# Altium PCB Copy of main - shifted.PcbDoc (part 10 of 15)
Units mil, origin at the board's own origin, x right, y up, seen from the top; angles counter-clockwise.
Board outline 8394.55 x 5164.44 mil, 7 copper layers (Top Layer 1, Layer 2, Layer 3, Unused, Layer 4_pow, Layer 5_gnd, Bottom 6+gnd), stack 46.112 mil thick; 363 components, 409 nets, 1750 pads, 991 vias.
Unrouted connection lines stored in the file: 111.
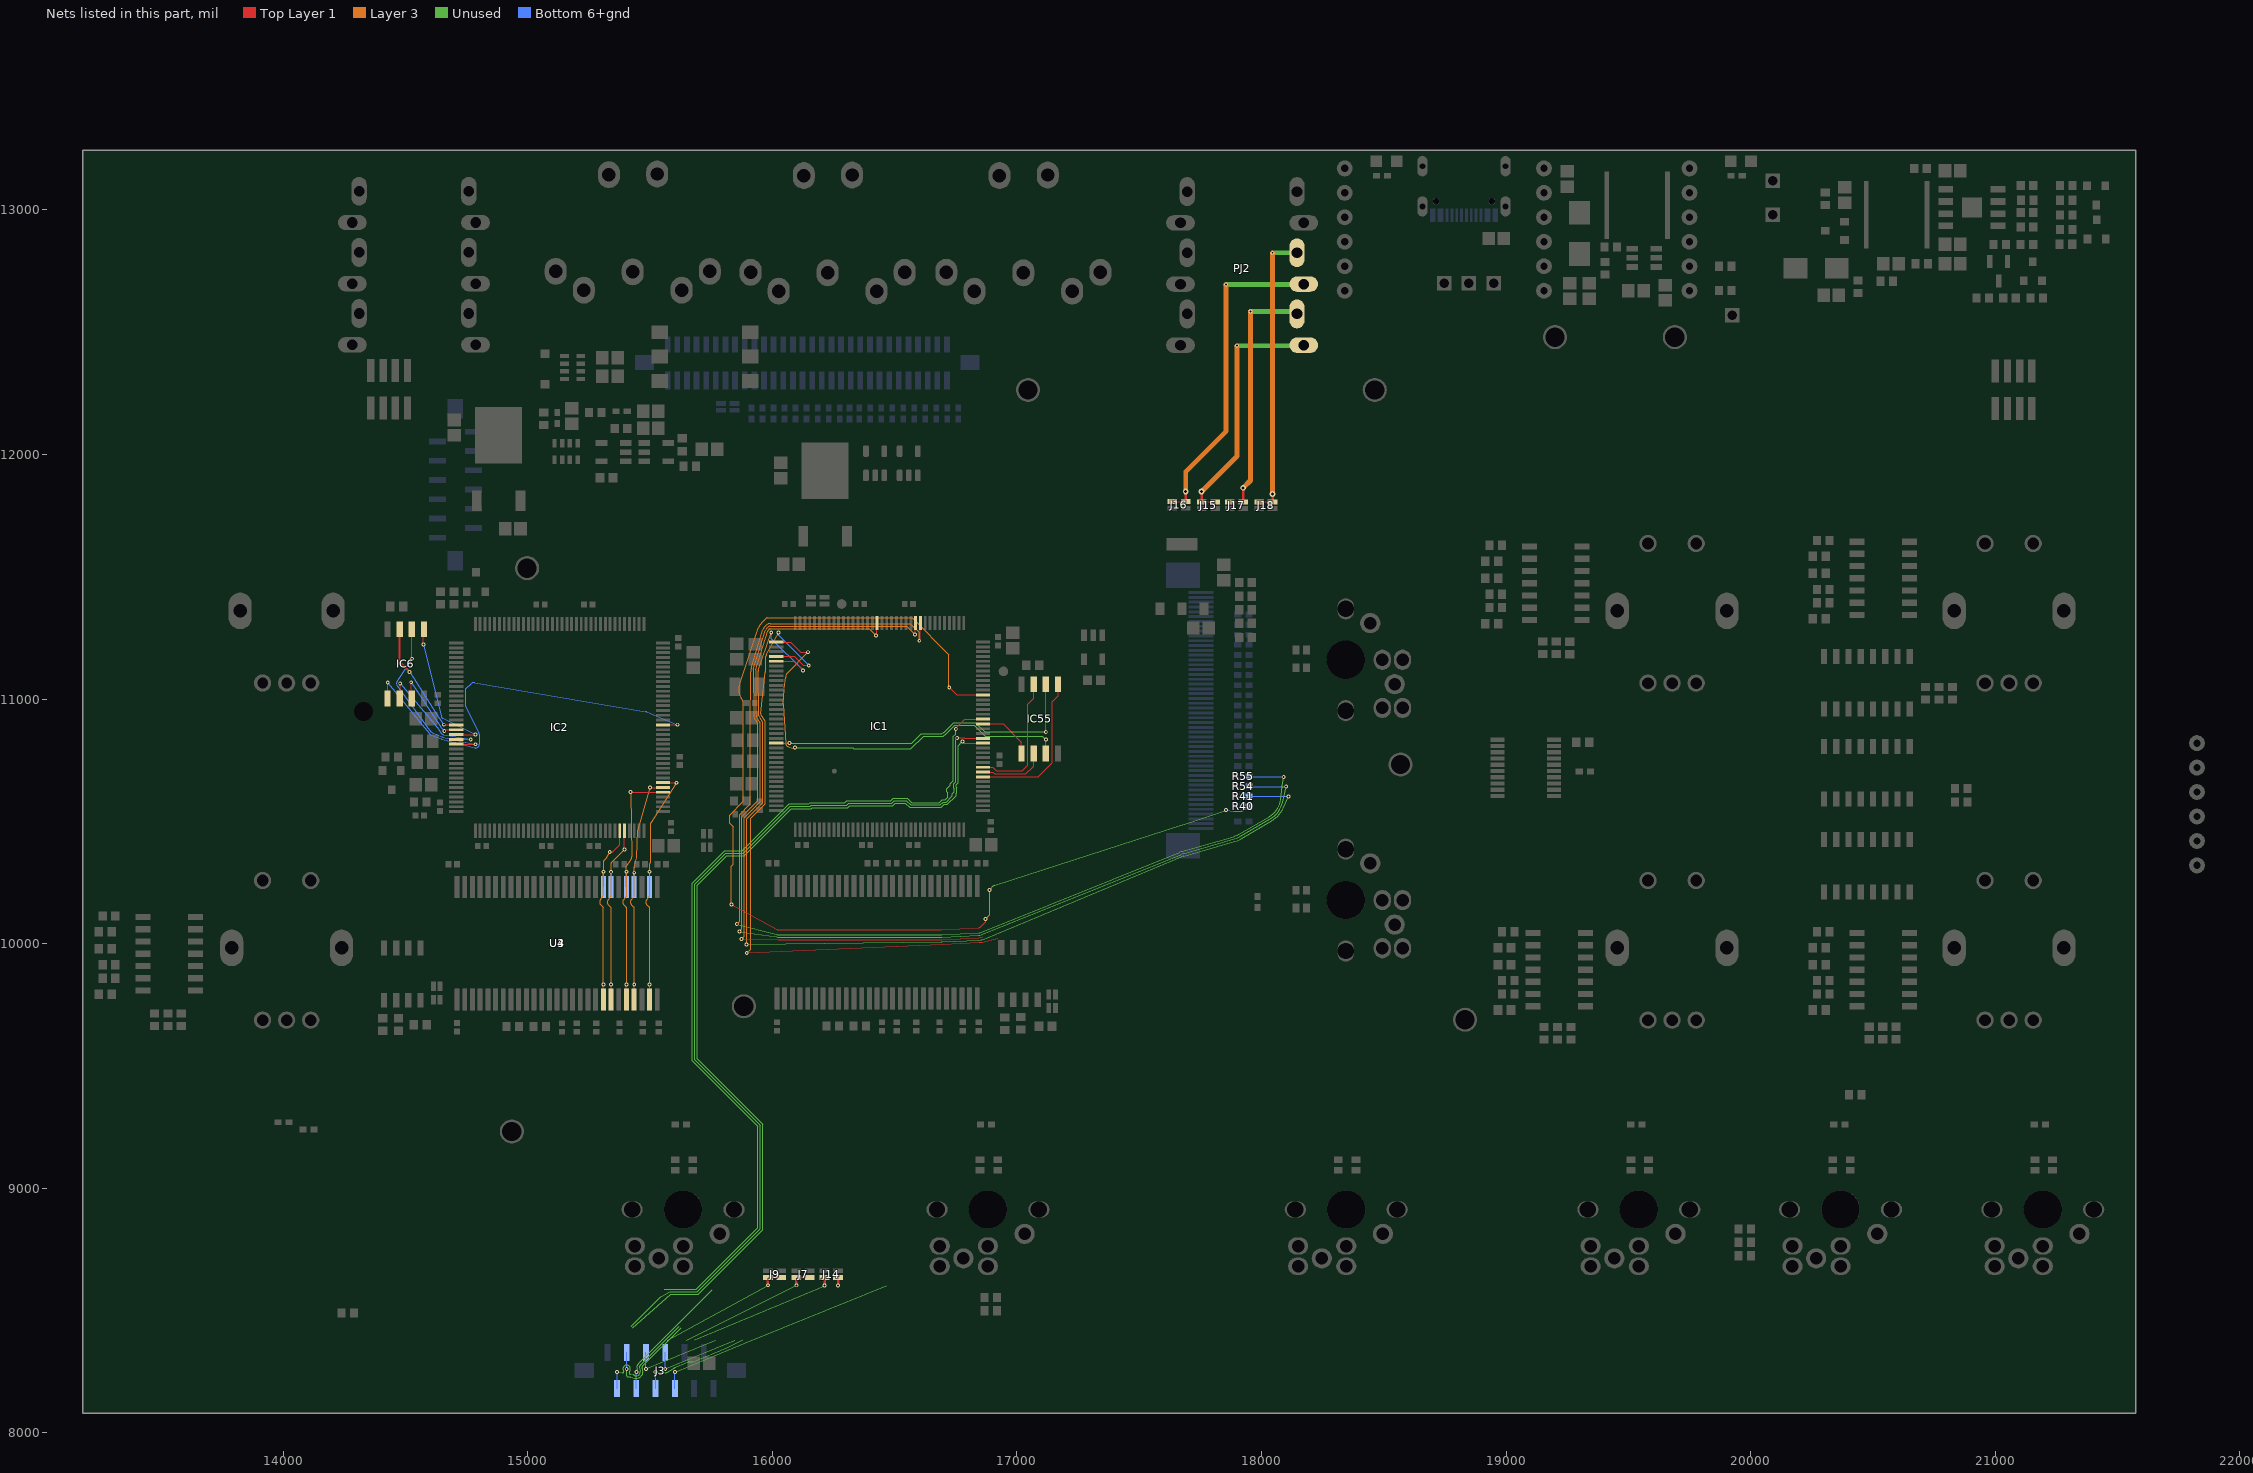
[diagram p13: the nets of this part, all layers, seen from the top]

## Via types
v1: diameter 15.75, hole 7.87, Top Layer 1 to Bottom 6+gnd, tented both sides, 923 vias
v2: diameter 27.56, hole 11.81, Top Layer 1 to Bottom 6+gnd, 45 vias
v3: diameter 23.62/23.62/23.62/23.62/23.62/23.62/23.62 (per signal layer), hole 12, Top Layer 1 to Bottom 6+gnd, tented top, 10 vias
v4: diameter 15.75, hole 7.87, Top Layer 1 to Bottom 6+gnd, 10 vias
v5: diameter 23.62/23.62/23.62/23.62/23.62/23.62/23.62 (per signal layer), hole 12, Top Layer 1 to Bottom 6+gnd, tented bottom, 3 vias

## Nets (pads, with @x,y where several pads share a name; then routed paths per layer and width w, separated by ;. In a path a pad name is that pad's centre, name@x,y a point inside that pad or via, vN(x,y) a via of type N, cw(c..) or ccw(c..) an arc to the next point about the centre after c; other vN are vias at no path point) (continued)
DD11: IC2.67 U3.47 U4.47 | length 1291.6
  Top Layer 1 w5: U3.47@15308.83,9771.4 v1@15308.83,9833.24 ; v1(15334.85,10374.63) 15345.25,10374.63 15375.91,10405.29 IC2.67@15375.91,10461.87
  Layer 3 w5: v1(15309.07,9833.49) 15309.07,10145.64 ; 15309.07,10200.79 cw(c15304.07,10200.88) 15308.29,10198.2 15295.6,10178.18 ; 15309.07,10200.83 15309.07,10293.59 v1(15309.58,10294.1) 15309.58,10336.08 ; 15323.63,10353.18 v1(15334.85,10374.63) ; 15295.6,10178.18 ccw(c15308.58,10169.94) 15297.73,10159.05 ; 15295.6,10178.18 ccw(c15308.58,10169.94) 15297.73,10159.05 ; 15295.6,10178.18 ccw(c15308.58,10169.94) 15297.73,10159.05 ; 15295.6,10178.18 ccw(c15308.58,10169.94) 15297.73,10159.05 ; 15295.6,10178.18 ccw(c15308.58,10169.94) 15297.73,10159.05 ; 15295.6,10178.18 ccw(c15308.58,10169.94) 15297.73,10159.05 ; 15295.6,10178.18 ccw(c15308.58,10169.94) 15297.73,10159.05 ; 15295.6,10178.18 ccw(c15308.58,10169.94) 15297.73,10159.05 ; 15295.6,10178.18 ccw(c15308.58,10169.94) 15297.73,10159.05 ; 15295.6,10178.18 ccw(c15308.58,10169.94) 15297.73,10159.05 ; 15295.6,10178.18 ccw(c15308.58,10169.94) 15297.73,10159.05 ; 15295.6,10178.18 ccw(c15308.58,10169.94) 15297.73,10159.05 ; 15295.6,10178.18 ccw(c15308.58,10169.94) 15297.73,10159.05 ; 15295.6,10178.18 ccw(c15308.58,10169.94) 15297.73,10159.05 ; 15295.6,10178.18 ccw(c15308.58,10169.94) 15297.73,10159.05 ; 15295.6,10178.18 ccw(c15308.58,10169.94) 15297.73,10159.05 ; 15297.73,10159.05 15307.62,10149.12 ; 15307.62,10149.12 cw(c15304.07,10145.59) 15309.07,10145.68 ; 15307.62,10149.12 cw(c15304.07,10145.59) 15309.07,10145.68 ; 15307.62,10149.12 cw(c15304.07,10145.59) 15309.07,10145.68 ; 15307.62,10149.12 cw(c15304.07,10145.59) 15309.07,10145.68 ; 15307.62,10149.12 cw(c15304.07,10145.59) 15309.07,10145.68 ; 15307.62,10149.12 cw(c15304.07,10145.59) 15309.07,10145.68 ; 15307.62,10149.12 cw(c15304.07,10145.59) 15309.07,10145.68 ; 15307.62,10149.12 cw(c15304.07,10145.59) 15309.07,10145.68 ; 15307.62,10149.12 cw(c15304.07,10145.59) 15309.07,10145.68 ; 15307.62,10149.12 cw(c15304.07,10145.59) 15309.07,10145.68 ; 15307.62,10149.12 cw(c15304.07,10145.59) 15309.07,10145.68 ; 15307.62,10149.12 cw(c15304.07,10145.59) 15309.07,10145.68 ; 15307.62,10149.12 cw(c15304.07,10145.59) 15309.07,10145.68 ; 15307.62,10149.12 cw(c15304.07,10145.59) 15309.07,10145.68 ; 15307.62,10149.12 cw(c15304.07,10145.59) 15309.07,10145.68 ; 15307.62,10149.12 cw(c15304.07,10145.59) 15309.07,10145.68 ; 15309.58,10336.08 cw(c15314.58,10336.08) 15311.02,10339.59 ; 15309.58,10336.08 cw(c15314.58,10336.08) 15311.02,10339.59 ; 15309.58,10336.08 cw(c15314.58,10336.08) 15311.02,10339.59 ; 15309.58,10336.08 cw(c15314.58,10336.08) 15311.02,10339.59 ; 15309.58,10336.08 cw(c15314.58,10336.08) 15311.02,10339.59 ; 15309.58,10336.08 cw(c15314.58,10336.08) 15311.02,10339.59 ; 15309.58,10336.08 cw(c15314.58,10336.08) 15311.02,10339.59 ; 15309.58,10336.08 cw(c15314.58,10336.08) 15311.02,10339.59 ; 15309.58,10336.08 cw(c15314.58,10336.08) 15311.02,10339.59 ; 15309.58,10336.08 cw(c15314.58,10336.08) 15311.02,10339.59 ; 15309.58,10336.08 cw(c15314.58,10336.08) 15311.02,10339.59 ; 15309.58,10336.08 cw(c15314.58,10336.08) 15311.02,10339.59 ; 15309.58,10336.08 cw(c15314.58,10336.08) 15311.02,10339.59 ; 15309.58,10336.08 cw(c15314.58,10336.08) 15311.02,10339.59 ; 15309.58,10336.08 cw(c15314.58,10336.08) 15311.02,10339.59 ; 15309.58,10336.08 cw(c15314.58,10336.08) 15311.02,10339.59 ; 15311.02,10339.59 15320.89,10349.46 ; 15320.89,10349.46 ccw(c15310,10360.32) 15323.62,10353.19 ; 15320.89,10349.46 ccw(c15310,10360.32) 15323.62,10353.19 ; 15320.89,10349.46 ccw(c15310,10360.32) 15323.62,10353.19 ; 15320.89,10349.46 ccw(c15310,10360.32) 15323.62,10353.19 ; 15320.89,10349.46 ccw(c15310,10360.32) 15323.62,10353.19 ; 15320.89,10349.46 ccw(c15310,10360.32) 15323.62,10353.19 ; 15320.89,10349.46 ccw(c15310,10360.32) 15323.62,10353.19 ; 15320.89,10349.46 ccw(c15310,10360.32) 15323.62,10353.19 ; 15320.89,10349.46 ccw(c15310,10360.32) 15323.62,10353.19 ; 15320.89,10349.46 ccw(c15310,10360.32) 15323.62,10353.19 ; 15320.89,10349.46 ccw(c15310,10360.32) 15323.62,10353.19 ; 15320.89,10349.46 ccw(c15310,10360.32) 15323.62,10353.19 ; 15320.89,10349.46 ccw(c15310,10360.32) 15323.62,10353.19 ; 15320.89,10349.46 ccw(c15310,10360.32) 15323.62,10353.19 ; 15320.89,10349.46 ccw(c15310,10360.32) 15323.62,10353.19 ; 15320.89,10349.46 ccw(c15310,10360.32) 15323.62,10353.19
  Bottom 6+gnd w5: U4.47@15308.83,10232.03 15309.58,10232.78 v1(15309.58,10294.1)
DD12: IC2.68 U3.48 U4.48 | length 1210.8
  Top Layer 1 w5: U3.48@15340.32,9771.4 v1@15340.32,9833.24 ; v1(15394.85,10384.63) 15395.22,10385 15395.22,10461.18 IC2.68@15395.48,10461.44
  Layer 3 w5: v1(15340.57,9833.49) 15340.57,10145.64 ; 15340.57,10195.56 15340.57,10293.63 v1(15340.33,10293.87) 15340.08,10294.12 15340.08,10327.78 ; v1(15394.85,10384.63) 15341.52,10331.3 ; 15328.56,10180.13 ccw(c15340.08,10169.94) 15329.21,10159.07 ; 15328.56,10180.13 ccw(c15340.08,10169.94) 15329.21,10159.07 ; 15328.56,10180.13 ccw(c15340.08,10169.94) 15329.21,10159.07 ; 15328.56,10180.13 ccw(c15340.08,10169.94) 15329.21,10159.07 ; 15328.56,10180.13 ccw(c15340.08,10169.94) 15329.2,10159.07 ; 15328.56,10180.13 ccw(c15340.08,10169.94) 15329.2,10159.07 ; 15328.56,10180.13 ccw(c15340.08,10169.94) 15329.2,10159.07 ; 15328.56,10180.13 ccw(c15340.08,10169.94) 15329.2,10159.07 ; 15328.56,10180.13 ccw(c15340.08,10169.94) 15329.2,10159.07 ; 15328.56,10180.13 ccw(c15340.08,10169.94) 15329.2,10159.07 ; 15328.56,10180.13 ccw(c15340.08,10169.94) 15329.2,10159.07 ; 15328.56,10180.13 ccw(c15340.08,10169.94) 15329.2,10159.07 ; 15328.56,10180.13 15339.31,10192.29 ; 15329.21,10159.07 15339.1,10149.17 ; 15339.1,10149.17 cw(c15335.57,10145.64) 15340.57,10145.67 ; 15339.1,10149.17 cw(c15335.57,10145.64) 15340.57,10145.67 ; 15339.1,10149.17 cw(c15335.57,10145.64) 15340.57,10145.67 ; 15339.1,10149.17 cw(c15335.57,10145.64) 15340.57,10145.67 ; 15339.1,10149.17 cw(c15335.57,10145.64) 15340.57,10145.67 ; 15339.1,10149.17 cw(c15335.57,10145.64) 15340.57,10145.67 ; 15339.1,10149.17 cw(c15335.57,10145.64) 15340.57,10145.67 ; 15339.1,10149.17 cw(c15335.57,10145.64) 15340.57,10145.67 ; 15339.1,10149.17 cw(c15335.57,10145.64) 15340.57,10145.67 ; 15339.1,10149.17 cw(c15335.57,10145.64) 15340.57,10145.67 ; 15339.1,10149.17 cw(c15335.57,10145.64) 15340.57,10145.67 ; 15339.1,10149.17 cw(c15335.57,10145.64) 15340.57,10145.67 ; 15339.1,10149.17 cw(c15335.57,10145.64) 15340.57,10145.67 ; 15339.1,10149.17 cw(c15335.57,10145.64) 15340.57,10145.67 ; 15339.1,10149.17 cw(c15335.57,10145.64) 15340.57,10145.67 ; 15339.1,10149.17 cw(c15335.57,10145.64) 15340.57,10145.67 ; 15339.31,10192.29 ccw(c15335.57,10195.6) 15340.57,10195.51 ; 15339.31,10192.29 ccw(c15335.57,10195.6) 15340.57,10195.51 ; 15339.31,10192.29 ccw(c15335.57,10195.6) 15340.57,10195.51 ; 15339.31,10192.29 ccw(c15335.57,10195.6) 15340.57,10195.51 ; 15339.31,10192.29 ccw(c15335.57,10195.6) 15340.57,10195.51 ; 15339.31,10192.29 ccw(c15335.57,10195.6) 15340.57,10195.51 ; 15339.31,10192.29 ccw(c15335.57,10195.6) 15340.57,10195.51 ; 15339.31,10192.29 ccw(c15335.57,10195.6) 15340.57,10195.51 ; 15339.31,10192.29 ccw(c15335.57,10195.6) 15340.57,10195.51 ; 15339.31,10192.29 ccw(c15335.57,10195.6) 15340.57,10195.51 ; 15339.31,10192.29 ccw(c15335.57,10195.6) 15340.57,10195.51 ; 15339.31,10192.29 ccw(c15335.57,10195.6) 15340.57,10195.51 ; 15339.31,10192.29 ccw(c15335.57,10195.6) 15340.57,10195.51 ; 15339.31,10192.29 ccw(c15335.57,10195.6) 15340.57,10195.51 ; 15339.31,10192.29 ccw(c15335.57,10195.6) 15340.57,10195.51 ; 15339.31,10192.29 ccw(c15335.57,10195.6) 15340.57,10195.51 ; 15340.08,10327.78 cw(c15345.08,10327.78) 15341.52,10331.3 ; 15340.08,10327.78 cw(c15345.08,10327.78) 15341.51,10331.29 ; 15340.08,10327.78 cw(c15345.08,10327.78) 15341.51,10331.29 ; 15340.08,10327.78 cw(c15345.08,10327.78) 15341.51,10331.29 ; 15340.08,10327.78 cw(c15345.08,10327.78) 15341.51,10331.29 ; 15340.08,10327.78 cw(c15345.08,10327.78) 15341.51,10331.29 ; 15340.08,10327.78 cw(c15345.08,10327.78) 15341.51,10331.29 ; 15340.08,10327.78 cw(c15345.08,10327.78) 15341.51,10331.29 ; 15340.08,10327.78 cw(c15345.08,10327.78) 15341.51,10331.29 ; 15340.08,10327.78 cw(c15345.08,10327.78) 15341.51,10331.29 ; 15340.08,10327.78 cw(c15345.08,10327.78) 15341.51,10331.29 ; 15340.08,10327.78 cw(c15345.08,10327.78) 15341.51,10331.29 ; 15340.08,10327.78 cw(c15345.08,10327.78) 15341.51,10331.29 ; 15340.08,10327.78 cw(c15345.08,10327.78) 15341.51,10331.29 ; 15340.08,10327.78 cw(c15345.08,10327.78) 15341.51,10331.29 ; 15340.08,10327.78 cw(c15345.08,10327.78) 15341.51,10331.29
  Bottom 6+gnd w5: U4.48@15340.33,10232.03 v1(15340.33,10293.87)
DD13: IC2.77 U3.50 U4.50 | length 1358.1
  Top Layer 1 w5: U3.50@15403.31,9771.4 v1@15403.31,9833.24 ; v1(15419.85,10619.63) 15420.26,10619.21 15479.52,10619.21 15479.93,10618.8 ; 15480.01,10618.88 IC2.77@15552.61,10618.88
  Layer 3 w5: 15392.17,10159.1 cw(c15403.07,10169.94) 15391.55,10180.12 15402.31,10192.29 ; 15392.18,10159.1 15402.1,10149.12 ; v1(15403.56,9833.49) 15403.56,10145.64 ; 15403.56,10195.56 15403.56,10293.63 v1(15403.07,10294.12) 15403.07,10315.78 ; v1(15419.85,10619.63) 15425.22,10354.94 ; 15402.1,10149.12 cw(c15398.56,10145.59) 15403.56,10145.68 ; 15402.1,10149.12 cw(c15398.56,10145.59) 15403.56,10145.68 ; 15402.1,10149.12 cw(c15398.56,10145.59) 15403.56,10145.68 ; 15402.1,10149.12 cw(c15398.56,10145.59) 15403.56,10145.68 ; 15402.1,10149.12 cw(c15398.56,10145.59) 15403.56,10145.68 ; 15402.1,10149.12 cw(c15398.56,10145.59) 15403.56,10145.68 ; 15402.1,10149.12 cw(c15398.56,10145.59) 15403.56,10145.68 ; 15402.1,10149.12 cw(c15398.56,10145.59) 15403.56,10145.68 ; 15402.1,10149.12 cw(c15398.56,10145.59) 15403.56,10145.68 ; 15402.1,10149.12 cw(c15398.56,10145.59) 15403.56,10145.68 ; 15402.1,10149.12 cw(c15398.56,10145.59) 15403.56,10145.68 ; 15402.1,10149.12 cw(c15398.56,10145.59) 15403.56,10145.68 ; 15402.1,10149.12 cw(c15398.56,10145.59) 15403.56,10145.68 ; 15402.1,10149.12 cw(c15398.56,10145.59) 15403.56,10145.68 ; 15402.1,10149.12 cw(c15398.56,10145.59) 15403.56,10145.68 ; 15402.1,10149.12 cw(c15398.56,10145.59) 15403.56,10145.68 ; 15402.31,10192.29 ccw(c15398.56,10195.6) 15403.56,10195.51 ; 15402.31,10192.29 ccw(c15398.56,10195.6) 15403.56,10195.51 ; 15402.31,10192.29 ccw(c15398.56,10195.6) 15403.56,10195.51 ; 15402.31,10192.29 ccw(c15398.56,10195.6) 15403.56,10195.51 ; 15402.31,10192.29 ccw(c15398.56,10195.6) 15403.56,10195.51 ; 15402.31,10192.29 ccw(c15398.56,10195.6) 15403.56,10195.51 ; 15402.31,10192.29 ccw(c15398.56,10195.6) 15403.56,10195.51 ; 15402.31,10192.29 ccw(c15398.56,10195.6) 15403.56,10195.51 ; 15402.31,10192.29 ccw(c15398.56,10195.6) 15403.56,10195.51 ; 15402.31,10192.29 ccw(c15398.56,10195.6) 15403.56,10195.51 ; 15402.31,10192.29 ccw(c15398.56,10195.6) 15403.56,10195.51 ; 15402.31,10192.29 ccw(c15398.56,10195.6) 15403.56,10195.51 ; 15402.31,10192.29 ccw(c15398.56,10195.6) 15403.56,10195.51 ; 15402.31,10192.29 ccw(c15398.56,10195.6) 15403.56,10195.51 ; 15402.31,10192.29 ccw(c15398.56,10195.6) 15403.56,10195.51 ; 15402.31,10192.29 ccw(c15398.56,10195.6) 15403.56,10195.51 ; 15403.07,10315.78 cw(c15408.07,10315.78) 15403.94,10318.59 ; 15403.07,10315.78 cw(c15408.07,10315.78) 15403.94,10318.59 ; 15403.07,10315.78 cw(c15408.07,10315.78) 15403.94,10318.59 ; 15403.07,10315.78 cw(c15408.07,10315.78) 15403.94,10318.59 ; 15403.07,10315.78 cw(c15408.07,10315.78) 15403.94,10318.59 ; 15403.07,10315.78 cw(c15408.07,10315.78) 15403.94,10318.59 ; 15403.07,10315.78 cw(c15408.07,10315.78) 15403.94,10318.59 ; 15403.07,10315.78 cw(c15408.07,10315.78) 15403.94,10318.59 ; 15403.07,10315.78 cw(c15408.07,10315.78) 15403.94,10318.59 ; 15403.07,10315.78 cw(c15408.07,10315.78) 15403.94,10318.59 ; 15403.07,10315.78 cw(c15408.07,10315.78) 15403.94,10318.59 ; 15403.07,10315.78 cw(c15408.07,10315.78) 15403.94,10318.59 ; 15403.07,10315.78 cw(c15408.07,10315.78) 15403.94,10318.59 ; 15403.07,10315.78 cw(c15408.07,10315.78) 15403.94,10318.59 ; 15403.07,10315.78 cw(c15408.07,10315.78) 15403.94,10318.59 ; 15403.07,10315.78 cw(c15408.07,10315.78) 15403.94,10318.59 ; 15403.94,10318.59 15422.56,10345.98 ; 15422.56,10345.98 ccw(c15409.85,10354.63) 15425.22,10354.94 ; 15422.56,10345.98 ccw(c15409.85,10354.63) 15425.22,10354.94 ; 15422.56,10345.98 ccw(c15409.85,10354.63) 15425.22,10354.94 ; 15422.56,10345.98 ccw(c15409.85,10354.63) 15425.22,10354.94 ; 15422.56,10345.98 ccw(c15409.85,10354.63) 15425.22,10354.94 ; 15422.56,10345.98 ccw(c15409.85,10354.63) 15425.22,10354.94 ; 15422.56,10345.98 ccw(c15409.85,10354.63) 15425.22,10354.94 ; 15422.56,10345.98 ccw(c15409.85,10354.63) 15425.22,10354.94 ; 15422.56,10345.98 ccw(c15409.85,10354.63) 15425.22,10354.94 ; 15422.56,10345.98 ccw(c15409.85,10354.63) 15425.22,10354.94 ; 15422.56,10345.98 ccw(c15409.85,10354.63) 15425.22,10354.94 ; 15422.56,10345.98 ccw(c15409.85,10354.63) 15425.22,10354.94 ; 15422.56,10345.98 ccw(c15409.85,10354.63) 15425.22,10354.94 ; 15422.56,10345.98 ccw(c15409.85,10354.63) 15425.22,10354.94 ; 15422.56,10345.98 ccw(c15409.85,10354.63) 15425.22,10354.94 ; 15422.56,10345.98 ccw(c15409.85,10354.63) 15425.22,10354.94
  Bottom 6+gnd w5: U4.50@15403.31,10232.03 v1@15403.31,10293.87
DD14: IC2.78 U3.51 U4.51 | length 1106.9
  Top Layer 1 w5: U3.51@15434.81,9771.4 v1@15434.81,9833.24 ; v1@15500.16,10638.41 IC2.78@15552.45,10638.41
  Layer 3 w5: v1(15435.06,9833.49) 15435.06,10145.64 ; 15435.06,10195.56 v1(15435.06,10290.22) 15435.06,10311.14 cw(c15440.06,10311.14) 15435.22,10312.4 15444.03,10345.53 ccw(c15409.85,10354.63) 15445.19,10353.12 15449.89,10463.17 ; 15449.89,10463.2 cw(c15454.88,10462.93) 15449.9,10463.3 15449.92,10463.62 cw(c15464.88,10462.47) 15450.46,10466.62 v1(15499.93,10638.17) ; 15433.6,10149.12 cw(c15430.06,10145.59) 15435.06,10145.68 ; 15433.6,10149.12 cw(c15430.06,10145.59) 15435.06,10145.68 ; 15433.6,10149.12 cw(c15430.06,10145.59) 15435.06,10145.68 ; 15433.6,10149.12 cw(c15430.06,10145.59) 15435.06,10145.68 ; 15433.6,10149.12 cw(c15430.06,10145.59) 15435.06,10145.68 ; 15433.6,10149.12 cw(c15430.06,10145.59) 15435.06,10145.68 ; 15433.6,10149.12 cw(c15430.06,10145.59) 15435.06,10145.68 ; 15433.6,10149.12 cw(c15430.06,10145.59) 15435.06,10145.68 ; 15433.6,10149.12 cw(c15430.06,10145.59) 15435.06,10145.68 ; 15433.6,10149.12 cw(c15430.06,10145.59) 15435.06,10145.68 ; 15433.6,10149.12 cw(c15430.06,10145.59) 15435.06,10145.68 ; 15433.6,10149.12 cw(c15430.06,10145.59) 15435.06,10145.68 ; 15433.6,10149.12 cw(c15430.06,10145.59) 15435.06,10145.68 ; 15433.6,10149.12 cw(c15430.06,10145.59) 15435.06,10145.68 ; 15433.6,10149.12 cw(c15430.06,10145.59) 15435.06,10145.68 ; 15433.6,10149.12 cw(c15430.06,10145.59) 15435.06,10145.68 ; 15433.6,10149.12 15423.67,10159.1 cw(c15434.57,10169.94) 15423.04,10180.12 15433.8,10192.29 ; 15433.8,10192.29 ccw(c15430.06,10195.6) 15435.06,10195.51 ; 15433.8,10192.29 ccw(c15430.06,10195.6) 15435.06,10195.51 ; 15433.8,10192.29 ccw(c15430.06,10195.6) 15435.06,10195.51 ; 15433.8,10192.29 ccw(c15430.06,10195.6) 15435.06,10195.51 ; 15433.8,10192.29 ccw(c15430.06,10195.6) 15435.06,10195.51 ; 15433.8,10192.29 ccw(c15430.06,10195.6) 15435.06,10195.51 ; 15433.8,10192.29 ccw(c15430.06,10195.6) 15435.06,10195.51 ; 15433.8,10192.29 ccw(c15430.06,10195.6) 15435.06,10195.51 ; 15433.8,10192.29 ccw(c15430.06,10195.6) 15435.06,10195.51 ; 15433.8,10192.29 ccw(c15430.06,10195.6) 15435.06,10195.51 ; 15433.8,10192.29 ccw(c15430.06,10195.6) 15435.06,10195.51 ; 15433.8,10192.29 ccw(c15430.06,10195.6) 15435.06,10195.51 ; 15433.8,10192.29 ccw(c15430.06,10195.6) 15435.06,10195.51 ; 15433.8,10192.29 ccw(c15430.06,10195.6) 15435.06,10195.51 ; 15433.8,10192.29 ccw(c15430.06,10195.6) 15435.06,10195.51 ; 15433.8,10192.29 ccw(c15430.06,10195.6) 15435.06,10195.51
  Bottom 6+gnd w5: U4.51@15434.81,10232.03 15435.06,10232.28 v1(15435.06,10290.22)
DD15: IC2.79 U3.53 U4.53 | length 1158
  Top Layer 1 w5: U3.53@15497.8,9771.46 v1@15497.8,9833.24 ; IC2.79@15552.61,10658.25 15552.8,10658.06 15607.9,10658.06 v1(15608.09,10657.87)
  Layer 3 w5: v1(15498.05,9833.49) 15498.05,10145.64 ; 15498.05,10195.56 15498.05,10293.63 v1(15497.56,10294.12) 15497.56,10327.34 15502.95,10332.73 15502.95,10491.51 cw(c15507.95,10491.51) 15503.73,10494.2 v1(15608.09,10657.87) ; 15496.59,10149.12 cw(c15493.05,10145.59) 15498.05,10145.68 ; 15496.59,10149.12 cw(c15493.05,10145.59) 15498.05,10145.68 ; 15496.59,10149.12 cw(c15493.05,10145.59) 15498.05,10145.68 ; 15496.59,10149.12 cw(c15493.05,10145.59) 15498.05,10145.68 ; 15496.59,10149.12 cw(c15493.05,10145.59) 15498.05,10145.68 ; 15496.59,10149.12 cw(c15493.05,10145.59) 15498.05,10145.68 ; 15496.59,10149.12 cw(c15493.05,10145.59) 15498.05,10145.68 ; 15496.59,10149.12 cw(c15493.05,10145.59) 15498.05,10145.68 ; 15496.59,10149.12 cw(c15493.05,10145.59) 15498.05,10145.68 ; 15496.59,10149.12 cw(c15493.05,10145.59) 15498.05,10145.68 ; 15496.59,10149.12 cw(c15493.05,10145.59) 15498.05,10145.68 ; 15496.59,10149.12 cw(c15493.05,10145.59) 15498.05,10145.68 ; 15496.59,10149.12 cw(c15493.05,10145.59) 15498.05,10145.68 ; 15496.59,10149.12 cw(c15493.05,10145.59) 15498.05,10145.68 ; 15496.59,10149.12 cw(c15493.05,10145.59) 15498.05,10145.68 ; 15496.59,10149.12 cw(c15493.05,10145.59) 15498.05,10145.68 ; 15496.59,10149.12 15486.66,10159.1 cw(c15497.56,10169.94) 15486.03,10180.12 15496.79,10192.29 ; 15496.79,10192.29 ccw(c15493.05,10195.6) 15498.05,10195.51 ; 15496.79,10192.29 ccw(c15493.05,10195.6) 15498.05,10195.51 ; 15496.79,10192.29 ccw(c15493.05,10195.6) 15498.05,10195.51 ; 15496.79,10192.29 ccw(c15493.05,10195.6) 15498.05,10195.51 ; 15496.79,10192.29 ccw(c15493.05,10195.6) 15498.05,10195.51 ; 15496.79,10192.29 ccw(c15493.05,10195.6) 15498.05,10195.51 ; 15496.79,10192.29 ccw(c15493.05,10195.6) 15498.05,10195.51 ; 15496.79,10192.29 ccw(c15493.05,10195.6) 15498.05,10195.51 ; 15496.79,10192.29 ccw(c15493.05,10195.6) 15498.05,10195.51 ; 15496.79,10192.29 ccw(c15493.05,10195.6) 15498.05,10195.51 ; 15496.79,10192.29 ccw(c15493.05,10195.6) 15498.05,10195.51 ; 15496.79,10192.29 ccw(c15493.05,10195.6) 15498.05,10195.51 ; 15496.79,10192.29 ccw(c15493.05,10195.6) 15498.05,10195.51 ; 15496.79,10192.29 ccw(c15493.05,10195.6) 15498.05,10195.51 ; 15496.79,10192.29 ccw(c15493.05,10195.6) 15498.05,10195.51 ; 15496.79,10192.29 ccw(c15493.05,10195.6) 15498.05,10195.51
  Bottom 6+gnd w5: U4.53@15497.8,10232.03 v1@15497.8,10293.87
DISP_CLK_3: J3.7 J7.1 J7.3 | length 964.1
  Top Layer 1 w10: v1@16098.03,8603.3 J7.1@16098.03,8635.04 J7.3@16153.15,8635.04
  Unused w5: v1(15561.75,8260.95) 15845.51,8378.94 ; 15648.66,8378.94 v1(16098.26,8603.07)
  Bottom 6+gnd w5: v1(15561.75,8260.95) 15561.75,8276.49 15561.87,8276.61 J3.7@15561.87,8328.46
DISP_DI_3: J3.5 J9.1 J9.3 | length 931.2
  Top Layer 1 w10: v1(15982.04,8603.19) 15981.81,8603.42 J9.3@15981.81,8635.16 J9.1@16036.93,8635.16
  Unused w5: v1(15483.01,8260.95) 15766.77,8378.94 ; 15569.92,8378.94 v1(15982.04,8603.19)
  Bottom 6+gnd w5: v1(15483.01,8260.95) 15483.01,8276.49 15483.13,8276.61 J3.5@15483.13,8328.46
DISP_DO_3: J3.6 J14.1 | length 1062.5
  Top Layer 1 w10: J14.1@16213.15,8635.04 16213.38,8634.81 v1(16213.38,8601.85)
  Unused w5: v1(15522.62,8248.34) 15560.65,8245.62 ccw(c15561.75,8260.95) 15569.44,8247.64 15593.66,8261.65 cw(c15601.36,8248.34) 15597.47,8263.21 ccw(c15596.19,8268.04) 15599.7,8264.48 15601.42,8266.21 cw(c15604.94,8262.66) 15603.02,8267.27 15656.71,8289.61 cw(c15658.65,8285) 15658.65,8290 15674.51,8290 ccw(c15674.51,8295) 15676.43,8290.38 15813.87,8347.53 ccw(c15811.95,8352.15) 15814.2,8347.69 15879.2,8380.52 ; 15682.35,8380.52 v1(16213.38,8601.85)
  Bottom 6+gnd w5: J3.6@15522.5,8180.83 15522.5,8232.68 15522.62,8232.8 v1(15522.62,8248.34)
DISP_NSS_3: J3.8 J14.3 | length 1034.4
  Top Layer 1 w10: J14.3@16268.27,8635.04 16268.5,8634.81 v1(16268.5,8601.85)
  Unused w5: v1(15601.36,8248.34) 15885.12,8366.33 16465.35,8601.85
  Bottom 6+gnd w5: J3.8@15601.24,8180.83 15601.24,8232.68 15601.36,8232.8 v1(15601.36,8248.34)
EXPR1_L_11: J15.2 J15.4 PJ2.26 | length 1027.2
  Top Layer 1 w5: J15.2@17755,11806.38 J15.4@17810.12,11806.38
  Top Layer 1 w10: J15.2@17755,11806.38 v3(17755,11848.82)
  Unused w20: v1(17900,12445) 18170.47,12445 PJ2.26@18172.56,12447.09
  Layer 3 w20: v3(17755,11848.82) 17900,11993.82 v1(17900,12445)
EXPR1_R_11: J16.2 J16.4 PJ2.24 | length 1329.3
  Top Layer 1 w5: J16.2@17634.88,11807.6 J16.4@17690,11807.6
  Top Layer 1 w10: J16.4@17690,11807.6 v3(17690,11848.82)
  Unused w20: v1(17855,12695) 18170.47,12695 PJ2.24@18172.56,12697.09
  Layer 3 w20: v3(17690,11848.82) 17690,11930 17855,12095 v1(17855,12695)
EXPR2_L_11: J17.2 J17.4 PJ2.6 | length 1040.4
  Top Layer 1 w5: J17.2@17870,11806.38 J17.4@17925.12,11806.38
  Top Layer 1 w10: v3(17925,11863.82) 17925,11806.5 J17.4@17925.12,11806.38
  Unused w20: v1(17955,12585) 18135,12585 PJ2.6@18145,12575
  Layer 3 w20: v3(17925,11863.82) 17955,11893.82 v1(17955,12585)
EXPR2_R_11: J18.2 J18.4 PJ2.4 | length 1173.8
  Top Layer 1 w5: J18.2@17990,11806.38 J18.4@18045.12,11806.38
  Top Layer 1 w10: v3(18045,11838.82) 18045,11806.5 J18.4@18045.12,11806.38
  Unused w20: v1(18045,12825) PJ2.4@18145,12825
  Layer 3 w20: v3(18045,11838.82) v1(18045,12825)
FLASH_CLK_6: IC1.22 IC55.6 | length 1347.7
  Top Layer 1 w5: IC1.22@16015.39,10819.92 v1@16070.28,10819.92 ; v1(17117.94,10865.88) 17117.94,11060.34 IC55.6@17118.15,11060.55
  Unused w5: v1(16070.35,10819.85) 16569.18,10819.85 16607.85,10858.51 16693.46,10858.51 16699.99,10865.04 16701.79,10865.04 16740.58,10903.82 16829.65,10903.82 16867.59,10865.88 v1(17117.94,10865.88)
FLASH_CLK_7: IC2.22 IC6.6 | length 753
  Top Layer 1 w5: IC6.6@14525.77,11285.63 14525.77,11165.84 v1(14526.49,11165.12) ; IC2.22@14707.15,10815.73 14707.39,10815.49 14785.63,10815.49 v1(14785.86,10815.26)
  Bottom 6+gnd w5: v1(14526.49,11165.12) 14465.31,11072.28 ccw(c14478.15,11063.82) 14465.77,11054.71 14603.73,10867.17 ccw(c14616.11,10876.28) 14610.24,10862.08 14648.78,10846.14 ccw(c14658.48,10869.59) 14652.96,10844.82 14763.14,10820.25 ; 14763.18,10820.24 v1(14785.86,10815.26)
FLASH_CS_6: IC1.91 IC55.1 | length 235
  Top Layer 1 w5: IC1.91@16860.92,10898.65 16943.32,10898.65 17018.15,10823.82 IC55.1@17018.15,10777.09
FLASH_CS_7: IC2.91 IC6.1 | length 1752.3
  Top Layer 1 w5: IC6.1@14425.77,11002.16 14427.35,11003.74 v1(14427.35,11067.29) ; IC2.91@15552.67,10894.47 15553.06,10894.86 15611.09,10894.86 v1(15611.48,10895.26)
  Bottom 6+gnd w5: v1(14427.35,11067.29) 14596.46,10860.23 ccw(c14616.11,10876.28) 14606.42,10852.83 14644.96,10836.9 ccw(c14658.48,10869.59) 14649.45,10835.39 14781.94,10800.39 ccw(c14785.86,10815.26) 14801.24,10815.26 14801.23,10855.26 ccw(c14785.86,10855.26) 14799.58,10862.21 14746.14,10967.68 cw(c14759.85,10974.63) 14744.48,10974.27 14743.27,11032.34 cw(c14758.64,11032.66) 14748.25,11043.99 14769.39,11063.37 cw(c14779.77,11052.03) 14782.33,11067.19 15482.6,10948.9 cw(c15479.93,10933.76) 15485.87,10947.94 v1(15611.48,10895.26)
FLASH_D0_6: IC1.80 IC55.5 | length 637.8
  Top Layer 1 w5: IC1.80@16860.91,10682.13 17086.46,10682.13 17144.05,10739.71 17144.05,10989.71 17168.15,11013.82 IC55.5@17168.15,11060.55
FLASH_D0_7: IC2.20 IC6.5 | length 604.6
  Top Layer 1 w5: v1(14573.15,11223.82) 14573.15,11283.01 IC6.5@14575.77,11285.63 ; IC2.20@14707.15,10855.1 14707.23,10855.18 14785.78,10855.18 v1(14785.86,10855.26)
  Bottom 6+gnd w5: v1(14573.15,11223.82) 14645.07,10930.97 ccw(c14659.99,10934.67) 14653.18,10920.89 v1(14785.86,10855.26)
FLASH_D1_6: IC1.81 IC55.2 | length 274.5
  Top Layer 1 w5: IC1.81@16860.91,10701.81 16901.36,10701.81 16909.05,10694.12 17035.94,10694.12 17068.15,10726.33 IC55.2@17068.15,10777.09
FLASH_D1_7: IC2.21 IC6.2 | length 509.9
  Top Layer 1 w5: IC6.2@14475.77,11002.16 14478.15,11004.54 v1(14478.15,11063.82) ; IC2.21@14707.15,10835.42 14707.23,10835.34 14766.41,10835.34 v1(14766.48,10835.26)
  Bottom 6+gnd w5: v1(14478.15,11063.82) 14627.86,10886.19 cw(c14616.11,10876.28) 14628.67,10885.15 14645.92,10860.72 ccw(c14658.48,10869.59) 14655.85,10854.44 v1(14766.48,10835.26)
FLASH_D2_6: IC1.1 IC55.3 | length 1753.9
  Top Layer 1 w5: IC1.1@16015.39,11233.31 16074.77,11233.31 16116.24,11191.83 v1(16145.24,11191.83) ; IC55.3@17118.15,10777.09 17118.15,10834.31 v1(17118.23,10834.39)
  Unused w5: v1(16092.24,10801.51) 16328.69,10801.51 16333,10797.2 16566.54,10797.2 16617.85,10848.51 16697.61,10848.51 16704.13,10855.04 16705.94,10855.04 16744.72,10893.82 16825.5,10893.82 16870.81,10848.51 17104.11,10848.51 v1(17118.23,10834.39)
  Layer 3 w5: 16048.08,11041.22 16043.91,10981.06 ccw(c16079.21,10978.64) 16043.92,10976.15 16055.02,10818.72 ccw(c16070.35,10819.85) 16065.59,10805.23 16090.24,10797.2 16090.24,10799.5 v1(16092.24,10801.51) ; 16048.32,11043.65 16054.06,11090.1 cw(c16089.16,11085.73) 16064.1,11110.69 v1(16145.24,11191.83)
FLASH_D2_7: IC2.19 IC6.3 | length 364.3
  Top Layer 1 w5: v1(14523.15,11068.82) 14523.15,11004.79 IC6.3@14525.77,11002.16 ; v1@14656.02,10864.22 14666.59,10874.79 IC2.19@14707.15,10874.79
  Bottom 6+gnd w5: v1(14523.15,11068.82) 14643.66,10886.77 ccw(c14656.48,10895.26) 14644.9,10885.15 v1(14658.48,10869.59)
FLASH_D3_6: IC1.82 IC55.7 | length 539.2
  Top Layer 1 w5: IC1.82@16860.91,10721.5 16900.95,10721.5 16915.24,10707.2 17021.54,10707.2 17043.15,10728.82 17043.15,10978.82 17068.15,11003.82 IC55.7@17068.15,11060.55
FLASH_D3_7: IC2.18 IC6.7 | length 499.7
  Top Layer 1 w5: v1(14656.48,10895.26) 14656.88,10894.86 14706.76,10894.86 IC2.18@14707.15,10894.47
  Top Layer 1 w8: IC6.7@14475.77,11285.63 14475.77,11151.91 v1(14516.58,11111.09)
  Bottom 6+gnd w5: v1(14516.58,11111.09) 14638.64,10920.97 ccw(c14659.99,10934.67) 14639.16,10920.2 v1(14656.48,10895.26)
FMC_A21_RS: IC1.4 | length 2737
  Top Layer 1 w5: v1(15895.24,9962.2) 16693.51,9996.9 ; IC1.4@16015.39,11174.25 16089.27,11174.25 16126.03,11137.5 v1(16148.55,11137.5) ; 16921.06,10021.37 ccw(c16922.44,10014) 16920.68,10021.29 16858.7,10006.66 cw(c16841.4,10080.02) 16845.35,10004.75 16694.1,9996.93 ; 16693.51,9996.9 ccw(c16690.24,10072.2) 16694.1,9996.93 ; 16693.51,9996.9 ccw(c16690.24,10072.2) 16694.1,9996.93 ; 16693.51,9996.9 ccw(c16690.24,10072.2) 16694.1,9996.93 ; 16693.51,9996.9 ccw(c16690.24,10072.2) 16694.1,9996.93 ; 16693.51,9996.9 ccw(c16690.24,10072.2) 16694.1,9996.93 ; 16693.51,9996.9 ccw(c16690.24,10072.2) 16694.1,9996.93 ; 16693.51,9996.9 ccw(c16690.24,10072.2) 16694.1,9996.93 ; 16693.51,9996.9 ccw(c16690.24,10072.2) 16694.1,9996.93 ; 16693.51,9996.9 ccw(c16690.24,10072.2) 16694.1,9996.93 ; 16693.51,9996.9 ccw(c16690.24,10072.2) 16694.1,9996.93 ; 16693.51,9996.9 ccw(c16690.24,10072.2) 16694.1,9996.93 ; 16693.51,9996.9 ccw(c16690.24,10072.2) 16694.1,9996.93 ; 16693.51,9996.9 ccw(c16690.24,10072.2) 16694.1,9996.93 ; 16693.51,9996.9 ccw(c16690.24,10072.2) 16694.1,9996.93 ; 16693.51,9996.9 ccw(c16690.24,10072.2) 16694.1,9996.93 ; 16693.51,9996.9 ccw(c16690.24,10072.2) 16694.1,9996.93
  Layer 3 w5: v1(15895.24,9962.2) 15910.95,9977.91 15910.95,10512.06 15970.02,10571.13 15970.02,10908.63 ; 15955.72,10929.76 cw(c15968.15,10938.82) 15952.87,10940.49 15971.72,11110.57 ccw(c15956.45,11112.31) 15971.81,11111.82 ; 15955.73,10929.76 15969.06,10911.54 cw(c15965.02,10908.59) 15970.02,10908.68 ; v1(16025.24,11272.2) 15975.68,11182.21 ccw(c15988.83,11175) 15973.84,11175.47 15971.81,11111.82 ; 15971.72,11110.58 ccw(c15956.45,11112.31) 15971.81,11111.82 ; 15971.72,11110.58 ccw(c15956.45,11112.31) 15971.81,11111.82 ; 15971.72,11110.58 ccw(c15956.45,11112.31) 15971.81,11111.82 ; 15971.72,11110.58 ccw(c15956.45,11112.31) 15971.81,11111.82
  Bottom 6+gnd w5: v1(16025.24,11272.2) 16025.24,11260.81 v1(16148.55,11137.5)
FMC_A22_RS: IC1.5 R41.2 | length 4455.2
  Top Layer 1 w5: IC1.5@16015.39,11154.57 16087.87,11154.57 v1(16125.24,11117.2)
  Unused w5: v1(15894.56,9996.73) 16691.15,10006.84 16693.58,10006.92 16844.77,10014.74 ccw(c16841.4,10080.02) 16863.51,10018.51 ccw(c16860.09,10027.9) 16863.92,10018.67 17671.85,10354.46 cw(c17710.04,10262.58) 17682.39,10358.16 17891.09,10418.54 ccw(c17859.4,10529.09) 17917.24,10429.69 18041.72,10502.34 ccw(c17983.57,10601.98) 18088.49,10553.99 v1(18110.55,10602.23)
  Layer 3 w5: v1(15894.56,9996.73) 15895.57,9997.75 15895.57,10510.82 15960.02,10575.27 15960.02,10904.54 ; 15941.9,11117.27 v1(15995.24,11272.2) ; 15941.9,11117.28 ccw(c15956.45,11112.31) 15941.07,11112.17 15942.78,10938.64 ; 15942.78,10938.64 ccw(c15968.15,10938.82) 15947.31,10924.34 ; 15942.78,10938.64 ccw(c15968.15,10938.82) 15947.31,10924.34 ; 15942.78,10938.64 ccw(c15968.15,10938.82) 15947.31,10924.34 ; 15942.78,10938.64 ccw(c15968.15,10938.82) 15947.31,10924.34 ; 15942.78,10938.64 ccw(c15968.15,10938.82) 15947.31,10924.34 ; 15942.78,10938.64 ccw(c15968.15,10938.82) 15947.31,10924.34 ; 15942.78,10938.64 ccw(c15968.15,10938.82) 15947.31,10924.34 ; 15942.78,10938.64 ccw(c15968.15,10938.82) 15947.31,10924.34 ; 15942.78,10938.64 ccw(c15968.15,10938.82) 15947.31,10924.34 ; 15942.78,10938.64 ccw(c15968.15,10938.82) 15947.31,10924.34 ; 15942.78,10938.64 ccw(c15968.15,10938.82) 15947.31,10924.34 ; 15942.78,10938.64 ccw(c15968.15,10938.82) 15947.31,10924.34 ; 15942.78,10938.64 ccw(c15968.15,10938.82) 15947.31,10924.34 ; 15942.78,10938.64 ccw(c15968.15,10938.82) 15947.31,10924.34 ; 15942.78,10938.64 ccw(c15968.15,10938.82) 15947.31,10924.34 ; 15942.78,10938.64 ccw(c15968.15,10938.82) 15947.31,10924.34 ; 15947.32,10924.33 15959.13,10907.3 ; 15959.13,10907.3 cw(c15955.02,10904.45) 15960.02,10904.54 ; 15959.13,10907.3 cw(c15955.02,10904.45) 15960.02,10904.54 ; 15959.13,10907.3 cw(c15955.02,10904.45) 15960.02,10904.54 ; 15959.13,10907.3 cw(c15955.02,10904.45) 15960.02,10904.54 ; 15959.13,10907.3 cw(c15955.02,10904.45) 15960.02,10904.54 ; 15959.13,10907.3 cw(c15955.02,10904.45) 15960.02,10904.54 ; 15959.13,10907.3 cw(c15955.02,10904.45) 15960.02,10904.54 ; 15959.13,10907.3 cw(c15955.02,10904.45) 15960.02,10904.54 ; 15959.13,10907.3 cw(c15955.02,10904.45) 15960.02,10904.54 ; 15959.13,10907.3 cw(c15955.02,10904.45) 15960.02,10904.54 ; 15959.13,10907.3 cw(c15955.02,10904.45) 15960.02,10904.54 ; 15959.13,10907.3 cw(c15955.02,10904.45) 15960.02,10904.54 ; 15959.13,10907.3 cw(c15955.02,10904.45) 15960.02,10904.54 ; 15959.13,10907.3 cw(c15955.02,10904.45) 15960.02,10904.54 ; 15959.13,10907.3 cw(c15955.02,10904.45) 15960.02,10904.54 ; 15959.13,10907.3 cw(c15955.02,10904.45) 15960.02,10904.54
  Bottom 6+gnd w5: v1(15995.24,11272.2) 15995.24,11247.2 v1(16125.24,11117.2) ; R41.2@17948.43,10602.19 17960.69,10602.23 v1(18110.55,10602.23)
FMC_NE1_CS: IC1.97 R40.2 | length 4660.8
  Top Layer 1 w5: v1(15832.36,10160.4) 16017.9,10058.69 ccw(c16025.24,10072.2) 16025.24,10056.83 16690.24,10056.83 ; 16691,10056.85 16842.19,10064.67 ccw(c16841.4,10080.02) 16849.78,10067.14 16871.44,10088.79 16871.44,10100.64 v1(16871.26,10100.81) ; v1(16723.12,11047.47) 16753.81,11016.77 IC1.97@16860.91,11016.77
  Unused w5: v1(16888.15,10218.82) 16901.98,10234.16 cw(c16913.4,10223.87) 16908.71,10238.51 17676.81,10487.18 ccw(c17672.07,10501.81) 17676.89,10487.21 v1(17855.01,10545.99)
  Layer 3 w5: v1(15832.36,10160.4) 15832.36,10316.32 15840.24,10324.2 15840.24,10477.2 15824.82,10492.62 15824.82,10525.93 15880.24,10581.35 15880.24,10990.13 ccw(c15875.24,10990.13) 15879.46,10992.81 15868.44,11010.17 cw(c15889.86,11023.77) 15864.49,11023.77 15864.49,11052.2 cw(c15889.86,11052.2) 15865.8,11060.27 15942.73,11289.8 cw(c15995.24,11272.2) 15956,11311.28 15975.48,11330.76 cw(c15979,11327.2) 15979,11332.2 16571.19,11332.2 16721.91,11181.49 16721.91,11048.67 v1(16723.12,11047.47) ; v1(16871.26,10100.81) 16888.15,10117.69 v1(16888.15,10218.82)
  Bottom 6+gnd w5: v1(17855.01,10545.99) 17887.39,10541.63 ccw(c17888.39,10549.06) 17888.39,10541.56 17917.91,10541.56 ccw(c17917.91,10549.06) 17921.87,10542.69 17936.16,10551.56 R40.2@17948.43,10560.87
FMC_NE4_CS: IC1.127 | length 2802.7
  Top Layer 1 w5: v1(15873.39,10019.05) 16024.42,10016.84 ccw(c16025.24,10072.2) 16025.24,10016.83 16690.24,10016.83 ccw(c16690.24,10072.2) 16693.05,10016.9 16844.28,10024.73 ccw(c16841.4,10080.02) 16860.09,10027.9 ; v1(16424,11259.98) 16426.05,11262.04 16426.05,11309.32 IC1.127@16428.31,11311.57
  Layer 3 w5: v1(15873.39,10019.05) 15885.57,10031.23 15885.57,10514.96 15950.02,10579.41 15950.02,10900.35 ; 15931.07,11112.09 cw(c15956.45,11112.31) 15932.18,11119.72 ; 15931.08,11112.09 15932.78,10938.49 ccw(c15968.15,10938.82) 15938.47,10919.57 15949.21,10903.03 cw(c15945.02,10900.31) 15950.02,10900.39 ; 15932.18,11119.73 15980.54,11276.73 cw(c15995.24,11272.2) 15984.43,11283.14 15988.13,11286.84 cw(c15991.69,11283.28) 15991.6,11288.28 16395.69,11288.28 v1(16424,11259.98)
FMC_NOE_RD: IC1.118 R55.2 | length 4606.7
  Top Layer 1 w5: v1(16600.63,11238.48) 16600.63,11241.39 16605.47,11246.23 IC1.118@16605.47,11311.57
  Unused w5: v1(15854.52,10079.87) 16016.37,10037.96 ccw(c16025.24,10072.2) 16025.24,10036.83 16690.24,10036.83 ccw(c16690.24,10072.2) 16692.04,10036.88 16843.25,10044.7 ccw(c16841.4,10080.02) 16854.62,10047.21 17665.44,10373.44 cw(c17710.04,10262.58) 17676.83,10377.37 17885.48,10437.74 ccw(c17859.4,10529.09) 17907.27,10447.03 18031.64,10519.61 ccw(c17983.57,10601.98) 18078.08,10589.22 18085.57,10644.65 v1(18090.6,10681.8)
  Layer 3 w5: v1(15854.52,10079.87) 15865.57,10090.92 15865.57,10527.54 15907.81,10569.77 ; 15907.83,10569.8 ccw(c15904.24,10573.28) 15909.24,10573.28 15909.27,10880.47 cw(c15924.65,10880.47) 15909.27,10880.55 15911.08,11112.66 cw(c15956.45,11112.31) 15913.08,11125.65 15961.43,11282.62 cw(c15995.24,11272.2) 15970.17,11297.17 15974.02,11301.01 cw(c15991.64,11283.28) 15991.64,11308.28 16564.16,11308.28 16599.54,11272.9 16599.54,11239.57 v1(16600.63,11238.48)
  Bottom 6+gnd w5: R55.2@17948.43,10684.82 17960.69,10681.98 17983.57,10681.98 ; 17983.79,10681.8 v1(18090.6,10681.8)
FMC_NWE_WE: IC1.119 R54.2 | length 4928.7
  Top Layer 1 w5: v1(16582.9,11264.24) 16584.34,11265.68 16584.34,11310.13 IC1.119@16585.79,11311.57
  Unused w5: v1(15864.89,10049.65) 16018.71,10027.3 ccw(c16025.24,10072.2) 16025.24,10026.83 16690.24,10026.83 ccw(c16690.24,10072.2) 16692.52,10026.89 16843.74,10034.71 ccw(c16841.4,10080.02) 16858.32,10037.93 17669.17,10364.16 cw(c17710.04,10262.58) 17679.61,10367.76 17888.3,10428.14 ccw(c17859.4,10529.09) 17912.31,10438.4 18036.68,10510.97 ccw(c17983.57,10601.98) 18086.34,10578.71 v1(18100.81,10642.59)
  Layer 3 w5: v1(15864.89,10049.65) 15875.57,10060.33 15875.57,10519.11 15940.02,10583.56 15940.02,10896.25 ; v1(16582.9,11264.24) 16548.86,11298.28 15991.64,11298.28 ; 15939.29,10898.77 cw(c15935.02,10896.16) 15940.02,10896.25 ; 15939.29,10898.77 cw(c15935.02,10896.16) 15940.02,10896.25 ; 15939.29,10898.77 cw(c15935.02,10896.16) 15940.02,10896.25 ; 15939.29,10898.77 cw(c15935.02,10896.16) 15940.02,10896.25 ; 15939.29,10898.77 cw(c15935.02,10896.16) 15940.02,10896.25 ; 15939.29,10898.77 cw(c15935.02,10896.16) 15940.02,10896.25 ; 15939.29,10898.77 cw(c15935.02,10896.16) 15940.02,10896.25 ; 15939.29,10898.77 cw(c15935.02,10896.16) 15940.02,10896.25 ; 15939.29,10898.77 cw(c15935.02,10896.16) 15940.02,10896.25 ; 15939.29,10898.77 cw(c15935.02,10896.16) 15940.02,10896.25 ; 15939.29,10898.77 cw(c15935.02,10896.16) 15940.02,10896.25 ; 15939.29,10898.77 cw(c15935.02,10896.16) 15940.02,10896.25 ; 15939.29,10898.77 cw(c15935.02,10896.16) 15940.02,10896.25 ; 15939.29,10898.77 cw(c15935.02,10896.16) 15940.02,10896.25 ; 15939.29,10898.77 cw(c15935.02,10896.16) 15940.02,10896.25 ; 15939.29,10898.77 cw(c15935.02,10896.16) 15940.02,10896.25 ; 15939.29,10898.77 15929.25,10915.46 cw(c15968.15,10938.82) 15922.78,10938.37 15921.08,11111.96 cw(c15956.45,11112.31) 15922.64,11122.72 15970.99,11279.67 ; 15970.99,11279.67 cw(c15995.24,11272.2) 15977.26,11290.11 ; 15970.99,11279.67 cw(c15995.24,11272.2) 15977.26,11290.11 ; 15970.99,11279.67 cw(c15995.24,11272.2) 15977.26,11290.11 ; 15970.99,11279.67 cw(c15995.24,11272.2) 15977.26,11290.11 ; 15970.99,11279.67 cw(c15995.24,11272.2) 15977.26,11290.11 ; 15970.99,11279.67 cw(c15995.24,11272.2) 15977.26,11290.11 ; 15970.99,11279.67 cw(c15995.24,11272.2) 15977.26,11290.11 ; 15970.99,11279.67 cw(c15995.24,11272.2) 15977.26,11290.11 ; 15970.99,11279.67 cw(c15995.24,11272.2) 15977.26,11290.11 ; 15970.99,11279.67 cw(c15995.24,11272.2) 15977.26,11290.11 ; 15970.99,11279.67 cw(c15995.24,11272.2) 15977.26,11290.11 ; 15970.99,11279.67 cw(c15995.24,11272.2) 15977.26,11290.11 ; 15970.99,11279.67 cw(c15995.24,11272.2) 15977.26,11290.11 ; 15970.99,11279.67 cw(c15995.24,11272.2) 15977.26,11290.11 ; 15970.99,11279.67 cw(c15995.24,11272.2) 15977.26,11290.11 ; 15970.99,11279.67 cw(c15995.24,11272.2) 15977.26,11290.11 ; 15977.26,11290.11 15981.07,11293.93 ; 15981.07,11293.93 cw(c15991.64,11283.28) 15991.64,11298.28 ; 15981.07,11293.93 cw(c15991.64,11283.28) 15991.64,11298.28 ; 15981.07,11293.93 cw(c15991.64,11283.28) 15991.64,11298.28 ; 15981.07,11293.93 cw(c15991.64,11283.28) 15991.64,11298.28 ; 15981.07,11293.93 cw(c15991.64,11283.28) 15991.64,11298.28 ; 15981.07,11293.93 cw(c15991.64,11283.28) 15991.64,11298.28 ; 15981.07,11293.93 cw(c15991.64,11283.28) 15991.64,11298.28 ; 15981.07,11293.93 cw(c15991.64,11283.28) 15991.64,11298.28 ; 15981.07,11293.93 cw(c15991.64,11283.28) 15991.64,11298.28 ; 15981.07,11293.93 cw(c15991.64,11283.28) 15991.64,11298.28 ; 15981.07,11293.93 cw(c15991.64,11283.28) 15991.64,11298.28 ; 15981.07,11293.93 cw(c15991.64,11283.28) 15991.64,11298.28 ; 15981.07,11293.93 cw(c15991.64,11283.28) 15991.64,11298.28 ; 15981.07,11293.93 cw(c15991.64,11283.28) 15991.64,11298.28 ; 15981.07,11293.93 cw(c15991.64,11283.28) 15991.64,11298.28 ; 15981.07,11293.93 cw(c15991.64,11283.28) 15991.64,11298.28
  Bottom 6+gnd w5: R54.2@17948.43,10643.5 17960.69,10642.59 v1(18100.81,10642.59)
FOOT1: IC1.92 J3.4 | length 4169.8
  Top Layer 1 w5: v1(16749.9,10877.25) 16749.9,10880.75 16787.5,10918.35 IC1.92@16860.91,10918.35
  Unused w5: v1(15443.88,8248.34) 15446.78,8256.61 ccw(c15442.06,8258.27) 15446.96,8259.23 15445.71,8265.59 cw(c15460.4,8268.62) 15449.05,8278.42 15457.98,8288.81 cw(c15461.77,8285.54) 15458.22,8289.06 15753.71,8584.55 ; 15556.86,8584.55 cw(c15560.38,8581) 15560.38,8586 15688.15,8586 15940.15,8838 15940.15,9254.15 15672.15,9522.15 15672.15,10246.85 15804.3,10379 15876.31,10379 16068.48,10571.16 16148.61,10571.16 16153.76,10576.31 16295.46,10576.31 16303.34,10584.19 16483.06,10584.19 16493.93,10595.06 16551.93,10595.06 16569.99,10577 16681.3,10577 16693.5,10589.19 16707.06,10589.19 16716.15,10598.28 16716.15,10616.71 16712.34,10620.52 16712.34,10633.25 16727.63,10648.55 16727.63,10653.94 16740.19,10666.49 16740.19,10847.4 16749.9,10857.11 v1(16749.9,10877.25)
  Bottom 6+gnd w5: J3.4@15443.76,8180.83 15443.76,8232.68 15443.88,8232.8 v1(15443.88,8248.34)
FOOT2: IC1.88 J3.2 | length 4268.7
  Top Layer 1 w5: v1(16755.56,10841.03) 16756.9,10842.37 16783.52,10842.37 16786.28,10839.61 IC1.88@16860.91,10839.61
  Unused w5: v1(15365.14,8248.34) 15386.35,8245 ccw(c15387.09,8249.95) 15391.43,8252.43 15390.94,8253.29 cw(c15404.27,8260.95) 15418.23,8254.52 15414.76,8246.99 ccw(c15419.3,8244.89) 15418.49,8239.95 15431.24,8237.95 cw(c15430.45,8233.01) 15433.74,8236.78 ccw(c15443.88,8248.34) 15458.9,8251.59 15455.51,8267.58 cw(c15460.4,8268.62) 15456.61,8271.88 15465.32,8282 cw(c15469.11,8278.74) 15465.57,8282.27 15619.41,8436.11 ; 15422.56,8436.11 15542.48,8556.03 cw(c15546.02,8552.49) 15543.69,8556.92 15580.15,8576 15692.29,8576 15950.15,8833.86 15950.15,9258.29 15682.15,9526.29 15682.15,10242.71 15808.44,10369 15880.46,10369 16072.62,10561.16 16154.17,10561.16 16159.32,10566.31 16303.32,10566.31 16311.2,10574.19 16487.2,10574.19 16498.07,10585.06 16547.79,10585.06 16565.85,10567 16685.45,10567 16697.64,10579.19 16711.2,10579.19 16736.16,10604.15 16736.16,10613.59 16743.09,10620.52 16743.09,10633.25 16741.81,10634.53 16741.81,10653.97 16750.19,10662.35 16750.19,10832.75 16755.56,10838.12 v1(16755.56,10841.03)
  Bottom 6+gnd w5: J3.2@15365.02,8180.82 15365.02,8232.67 15365.14,8232.79 v1(15365.14,8248.34)
FOOT3: IC1.87 J3.3 | length 4184
  Top Layer 1 w5: v1(16777.15,10827) 16784.23,10819.92 IC1.87@16860.91,10819.92
  Unused w5: v1(15404.27,8260.95) 15404.27,8233.28 ccw(c15409.27,8233.28) 15409.27,8228.28 15420.2,8228.28 cw(c15420.2,8223.28) 15421.51,8228.11 15437.24,8223.85 ccw(c15443.88,8248.34) 15438.84,8223.47 15440.84,8223.06 ccw(c15441.84,8227.96) 15441.81,8222.96 15443.88,8222.96 ccw(c15443.88,8248.34) 15463.62,8232.4 15468.89,8238.93 ccw(c15465,8242.07) 15470,8242.07 15470,8246.94 ccw(c15465,8246.94) 15469.89,8247.98 15468.7,8253.6 15466.99,8261.66 15466.32,8264.82 cw(c15471.21,8265.85) 15467.42,8269.11 15472.65,8275.19 cw(c15476.44,8271.93) 15472.88,8275.44 15626.44,8429 ; 15429.59,8429 cw(c15433.11,8425.45) 15429.79,8429.19 15583.84,8566 15696.43,8566 15960.15,8829.72 15960.15,9262.43 15692.15,9530.43 15692.15,10238.57 15812.58,10359 15884.6,10359 16076.54,10550.94 16158.09,10550.94 16163.46,10556.31 16307.46,10556.31 16315.34,10564.19 16491.34,10564.19 16502.21,10575.06 16543.65,10575.06 16561.71,10557 16689.59,10557 16701.78,10569.19 16715.34,10569.19 16751.81,10605.66 16751.81,10615.1 16753.09,10616.38 16753.09,10637.4 16751.81,10638.67 16751.81,10649.83 16760.19,10658.2 16760.19,10810.04 v1(16777.15,10827)
  Bottom 6+gnd w5: v1(15404.27,8260.95) 15404.27,8276.49 15404.39,8276.61 J3.3@15404.39,8328.46